# Altium PCB borda_pcb.PcbDoc
Units mm, origin at the board's own origin, x right, y up, seen from the top; angles counter-clockwise.
Board outline 9.14 x 6.6 mm, 2 copper layers (Top Layer, Bottom Layer); 4 components, 4 nets, 12 pads, 2 vias.
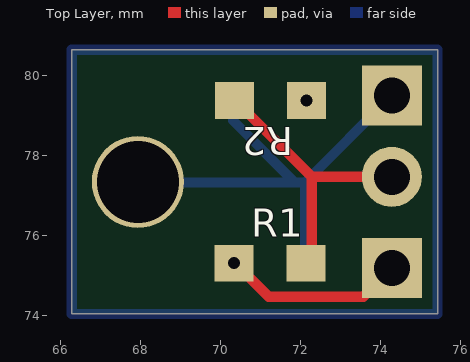
[diagram p0: Top Layer view]
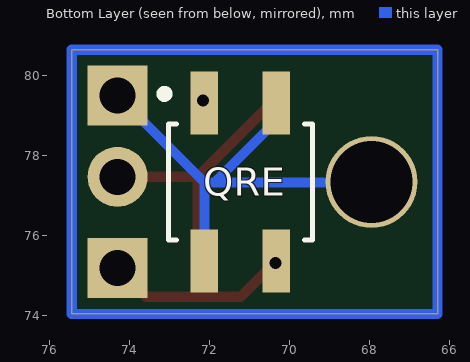
[diagram p1: Bottom Layer view, seen from below]

## Layer stack, top to bottom
Top Solder: solder mask 0.0102, Solder Resist, Dk 3.5
Top Layer: signal copper 0.0356
Dielectric 1: dielectric 0.32, FR-4, Dk 4.8
Bottom Layer: signal copper 0.0356
Bottom Solder: solder mask 0.0102, Solder Resist, Dk 3.5

## Board outline
66.294,74.041 75.438,74.041 75.438,80.645 66.294,80.645

## Design rules (kind name [scope] priority, off if disabled: settings)
Clearance [All] p1: gap=0.254 ignorepadtopadclearanceinfootprint=FALSE
PolygonConnect [All] p1: connectstyle=Relief reliefconductorwidth=0.254 reliefentries=4 polygonreliefangle="90 Angle" airgapwidth=0.254
RoutingVias [All] p1: holewidth=0.711 width=1.27 viastyle="Through Hole" minholewidth=0.711 minwidth=1.27 maxholewidth=0.711 maxwidth=1.27
SolderMaskExpansion [All] p1: expansion=0.102 istentingtop=FALSE
Width [All] p1: maxlimit=0.254 minlimit=0.254 preferedwidth=0.254
30 further rules are at their usual default settings.

## Classes and differential pairs
component class borda_sch: QRE R1 R2

## Components (designator, comment, footprint, x,y, rotation, side; value= is the part's Value field where it differs from the comment)
J? "Header 3" "HDR1X3 THT" 75.438,74.549 r90 top
QRE "QRE1113GR" SOIC180P460X187-4N 71.222,77.343 r180 bottom (schematic designator U?)
R1 "Resistor SMD" "Resistor SMD 0603" 71.247,75.311 r0 top value=10K
R2 "Resistor SMD" "Resistor SMD 0603" 71.258,79.375 r180 top value=100

## Footprints (in the part's own frame and the unit in brackets; to place one, negate y for a bottom-side part, rotate by r counter-clockwise, add the part's x,y. Pads: shape width x height; smd on the part's side, far side on the other; paste and mask are expansions set on the pad)
"HDR1X3 THT" [mm] "Connector; Header; 3 Position"
  rect 1.5x1.5 hole 0.9: 1(0.635,1.143) 3(4.953,1.143)
  round 1.5 hole 0.9: 2(2.921,1.143)
"Resistor SMD 0603" [mm]
  rect 0.98x0.92 smd: 1(-0.9,0) 2(0.9,0)
  body extent -0.8,-0.4 0.8,0.4, height 0.45
SOIC180P460X187-4N [mm]
  rect 0.69x1.57 smd: 1(-0.9,1.975) 2(-0.9,-1.975) 3(0.9,-1.975) 4(0.9,1.975)
  silkscreen extent -2,-1.45 1.8,2.3, body extent -1.7,-2.3 1.7,2.3, height 1.87

## Part data
J?: "Header, 3-Pin", LatestRevisionDate=17-Jul-2002, LatestRevisionNote="Re-released for DXP Platform.", Publisher="Altium Limited"
QRE: "Reflective Optical Sensor 0.039 (1mm) 4-SMD, Gull Wing", Package="ARUSM-313-4 ON Semiconductor", Availability="In Stock", Check_prices=https://www.snapeda.com/parts/QRE1113GR/Onsemi/view-part/?ref=eda, MF="ON Semiconductor", MP=QRE1113GR, Price=None, Purchase-URL=https://pricing.snapeda.com/search/part/QRE1113GR/?ref=eda, SnapEDA_Link=https://www.snapeda.com/parts/QRE1113GR/Onsemi/view-part/?ref=snap
R1 R2: "Resistor SMD com os tamanhos 0603, 0805, 1206 e 1210", Size=0603

## Free pads (board coordinates)
  round 2.3 hole 2.05: 2(67.945,77.343)

## Via types
v1: diameter 0.5, hole 0.3, Top Layer to Bottom Layer, 2 vias

## Nets (pads, with @x,y where several pads share a name; then routed paths per layer and width w, separated by ;. In a path a pad name is that pad's centre, name@x,y a point inside that pad or via, vN(x,y) a via of type N, cw(c..) or ccw(c..) an arc to the next point about the centre after c; other vN are vias at no path point)
GND: J?.3 pad.2 QRE.2 QRE.4 | length 11.8
  Bottom Layer w0.254: pad.2 67.959,77.329 71.871,77.329 ; QRE.4 70.322,78.878 71.871,77.329 ; QRE.2 72.122,77.329 ; J?.3 72.122,77.329 ; 71.871,77.329 72.122,77.329
NetR2_1: QRE.1 R2.1
  other v1: 72.158,79.375
OUT: J?.1 QRE.3 R1.1 | length 4.6
  Top Layer w0.254: v1(70.347,75.311) 70.377,75.311 71.218,74.47 73.581,74.47 J?.1
VCC: J?.2 R1.2 R2.2 | length 6.9
  Top Layer w0.254: R2.2 70.388,79.375 72.293,77.47 ; R1.2 72.293,75.457 72.293,77.47 ; J?.2 72.293,77.47
copper on no net: | length 31.5
  Bottom Layer w0.254: 66.294,74.041 66.294,80.645 66.548,80.645 75.057,80.645 75.438,80.645 75.438,74.041 66.294,74.041